# Altium PCB Trigger.PcbDoc
Units mil, origin at the board's own origin, x right, y up, seen from the top; angles counter-clockwise.
Board outline 3937.01 x 3937.01 mil, 2 copper layers (Top Layer, Bottom Layer); 31 components, 13 nets, 69 pads, 40 vias.
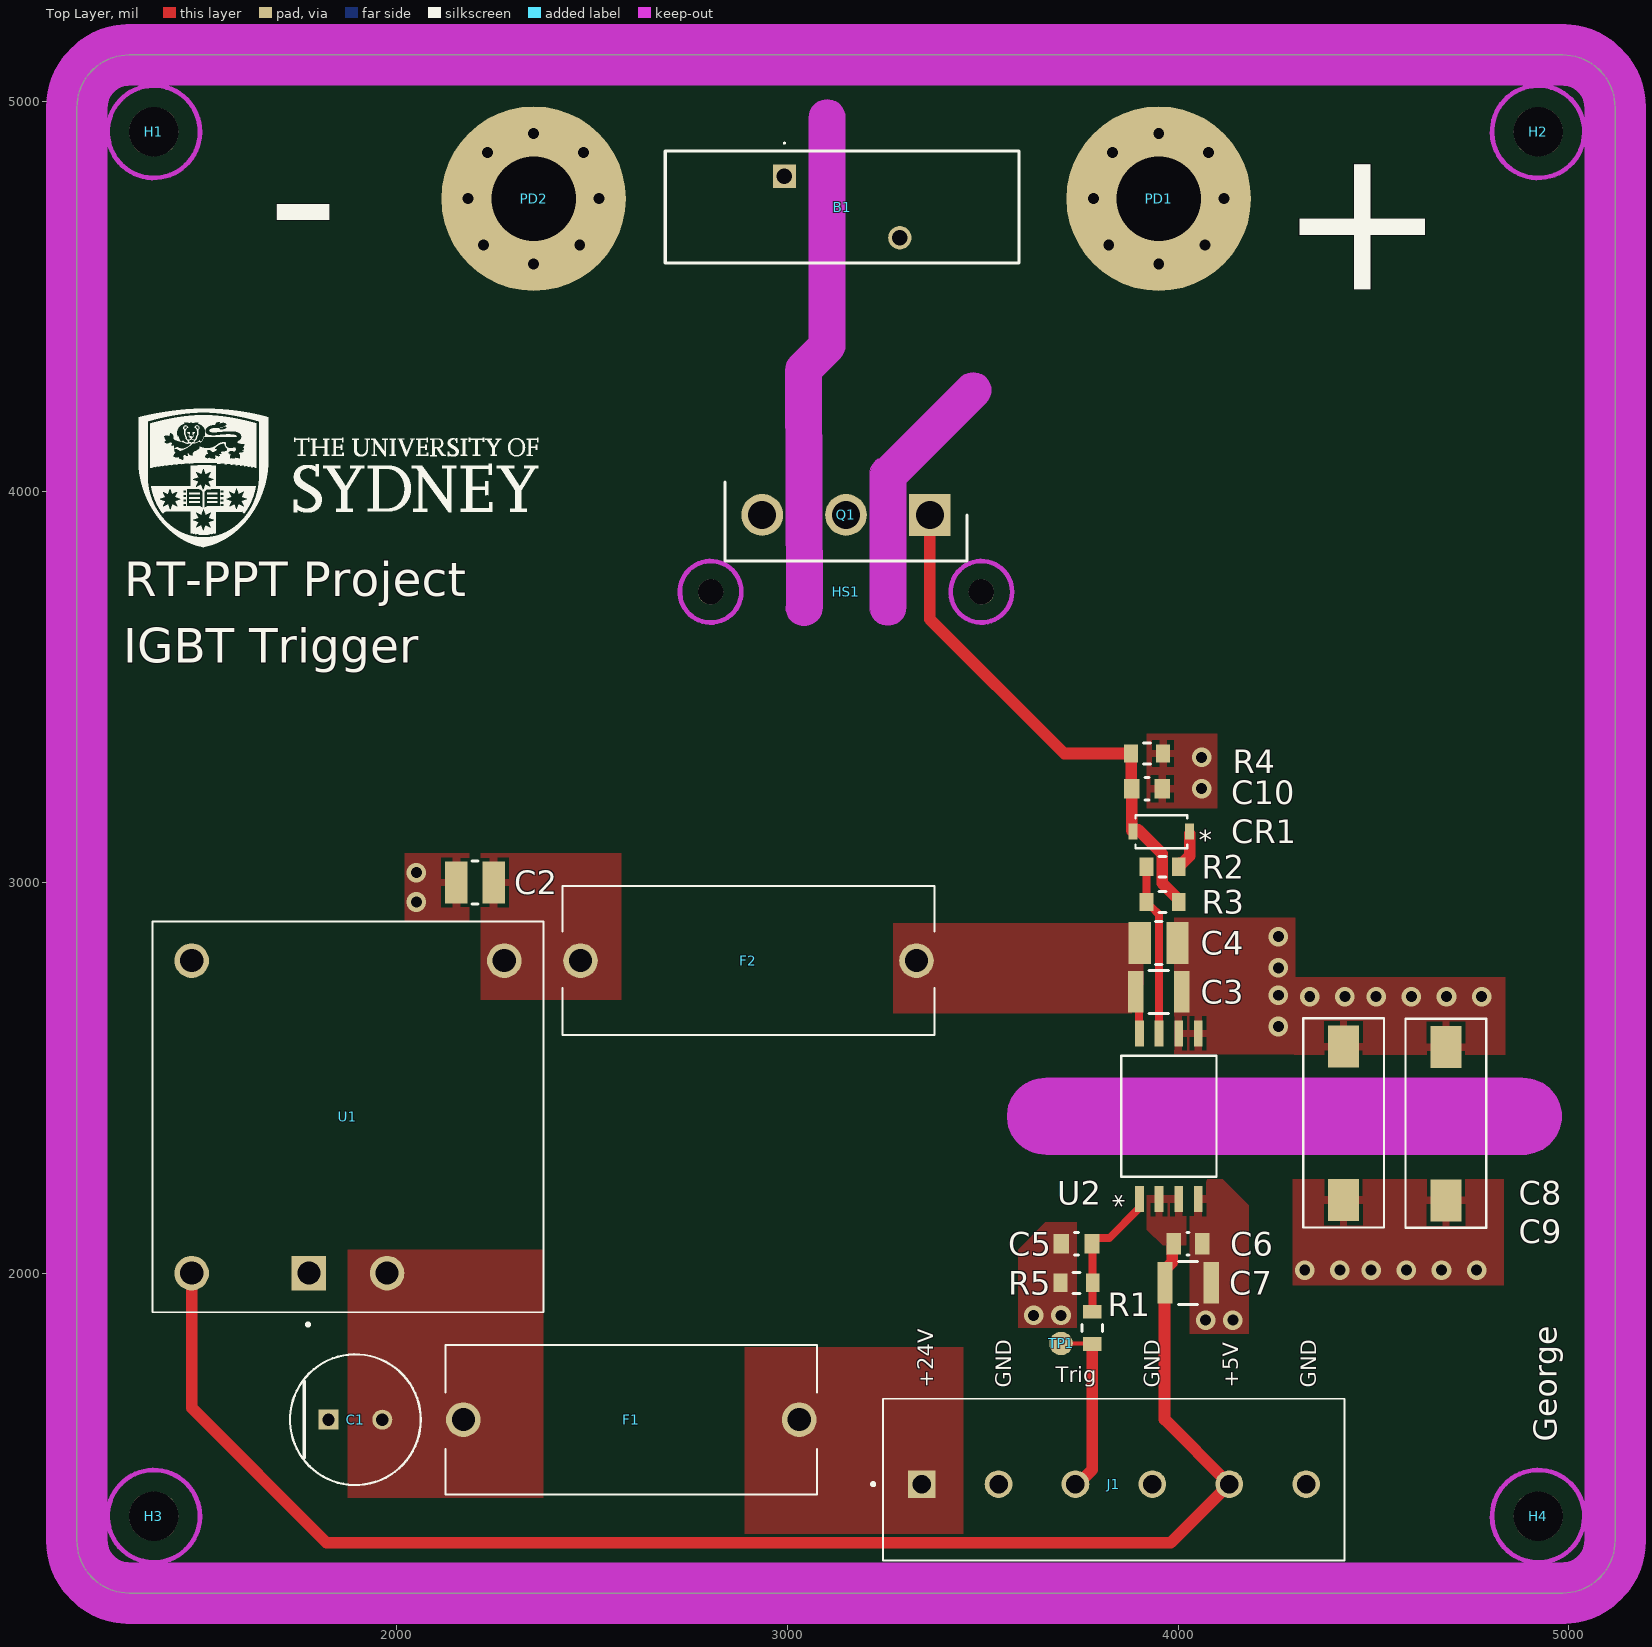
[diagram p0: Top Layer view]
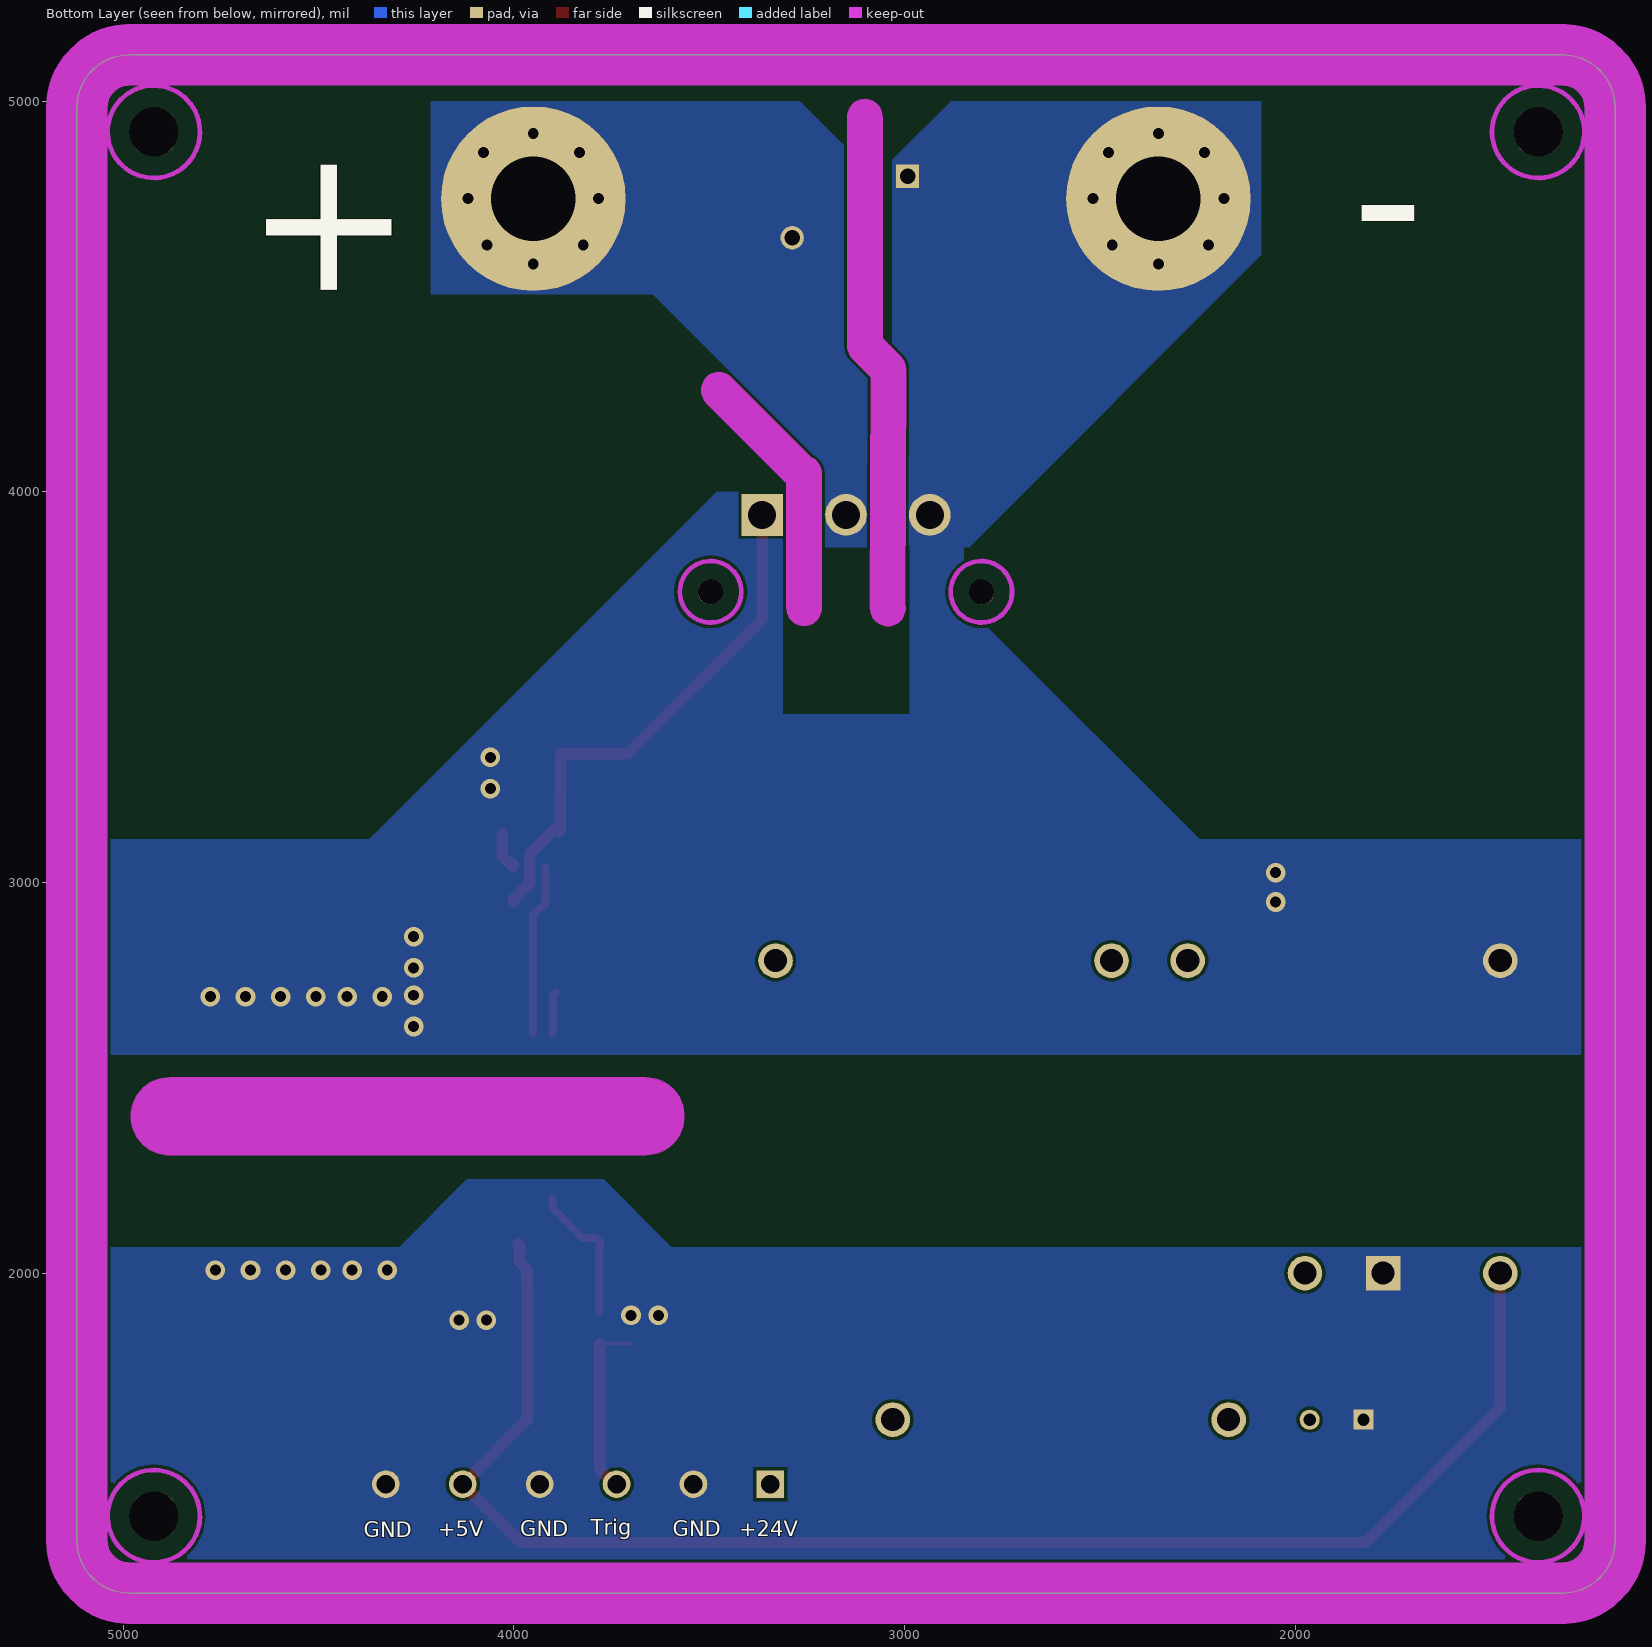
[diagram p1: Bottom Layer view, seen from below]
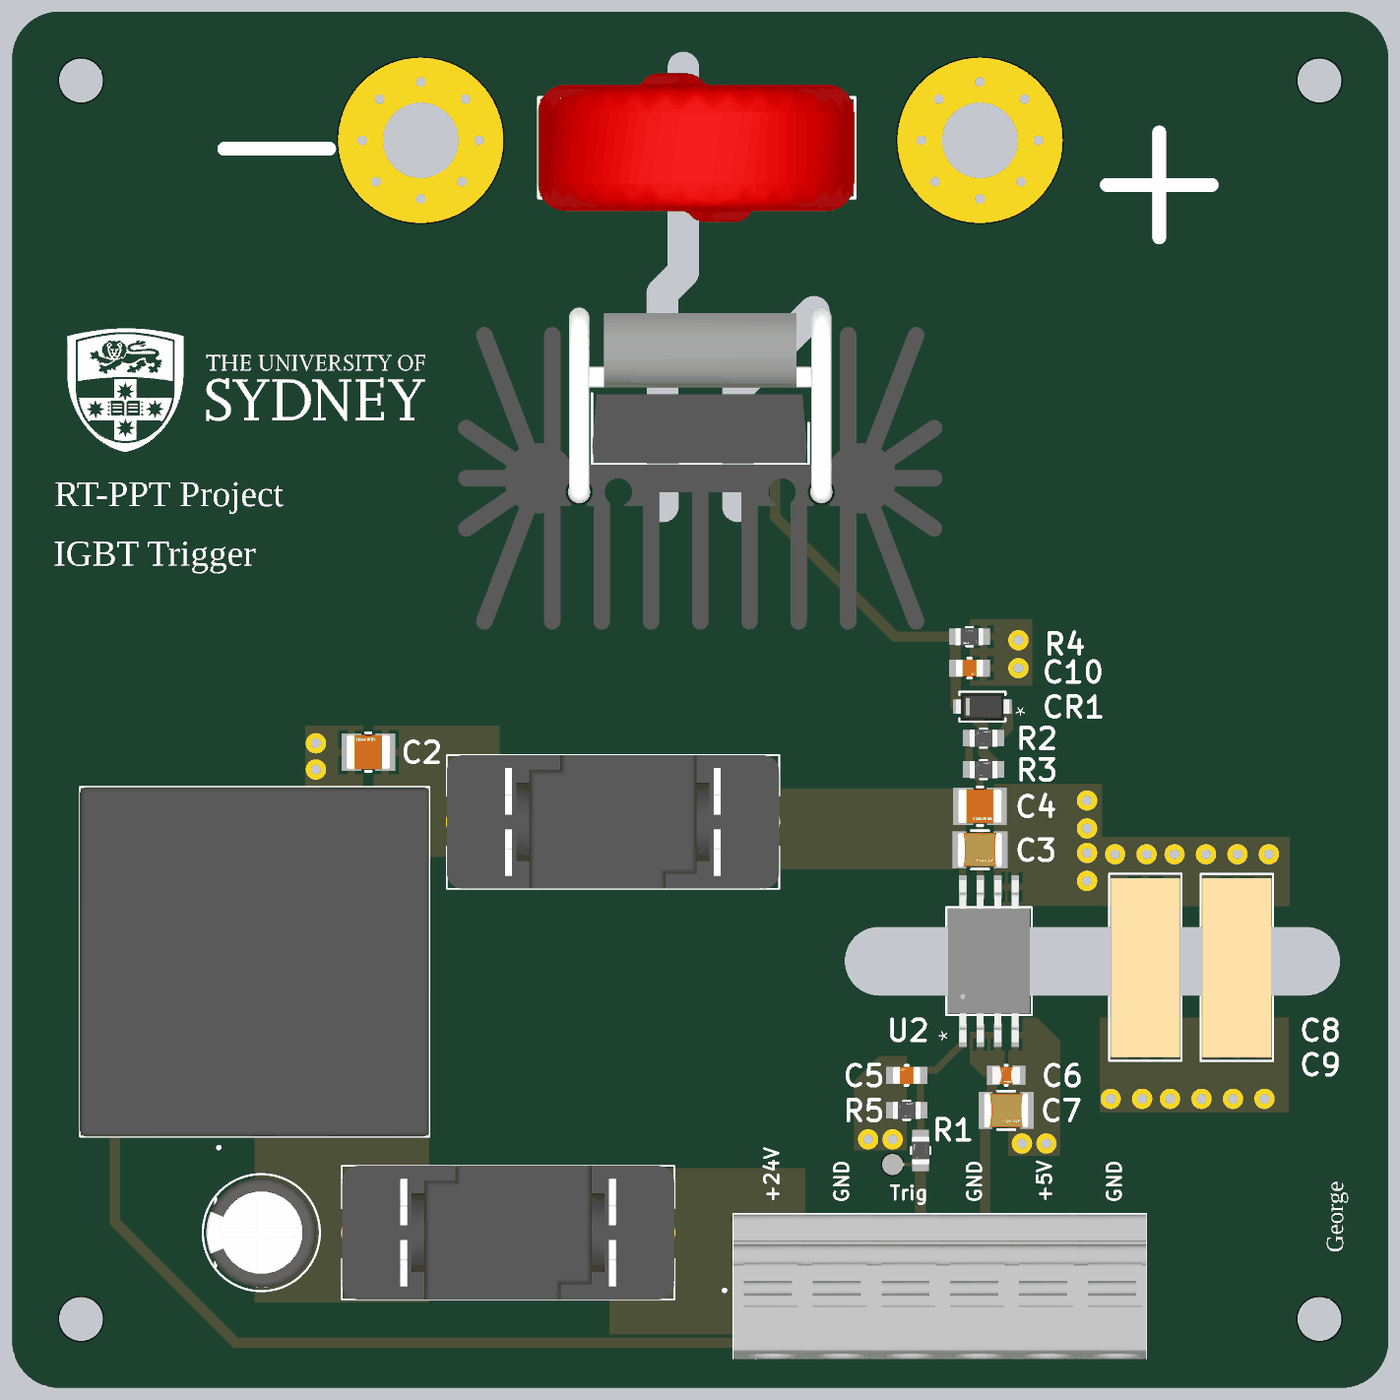
[diagram p2: 3D render of the assembled board from above, using the file's embedded part models]

## Layer stack, top to bottom
Top Solder: solder mask 0.4, Solder Resist, Dk 3.5
Top Layer: signal copper 2.7559
Dielectric 1: dielectric 12.6, FR-4, Dk 4.8
Bottom Layer: signal copper 2.7559
Bottom Solder: solder mask 0.4, Solder Resist, Dk 3.5

## Board outline
1315.52,1181.1 cw(c1315.52,1315.52) 1181.1,1315.52 1181.1,4983.69 cw(c1315.52,4983.69) 1315.52,5118.11 4983.69,5118.11 cw(c4983.69,4983.69) 5118.11,4983.69 5118.11,1315.52 cw(c4983.69,1315.52) 4983.69,1181.1
cut-out: 3661.42,2303.13 cw(c3661.42,2401.57) 3661.42,2500.01 4881.89,2500.01 cw(c4881.89,2401.57) 4980.33,2401.57 cw(c4881.89,2401.57) 4881.89,2303.13
cut-out: 2997.86,3711.26 2995.66,4312.78 cw(c3040.95,4312.95) 3008.92,4344.97 3055.96,4392.01 3055.96,4958.75 cw(c3101.25,4958.75) 3146.54,4958.75 3146.54,4373.25 cw(c3101.25,4373.25) 3133.28,4341.22 3086.31,4294.25 3088.48,3703.36 3088.48,3703.19 cw(c3043.18,3703.19) 3075.29,3671.25 3074.39,3670.34 cw(c3042.25,3702.25)
cut-out: 3211.71,3703 3211.71,4046 cw(c3257,4046) 3238.11,4087.17 3442.97,4292.03 cw(c3475,4260) 3520.29,4260 cw(c3475,4260) 3507.03,4227.97 3302.29,4023.24 3302.29,3703 cw(c3257,3703)

## Design rules (kind name [scope] priority, off if disabled: settings)
Clearance [All] p1: gap=8 ignorepadtopadclearanceinfootprint=FALSE
ComponentClearance [All] p1: gap=8 collisioncheckmode=3 verticalgap=8 showdistances=FALSE
DiffPairsRouting [All] p1: maxlimit=10 minlimit=7.87 mostfreqgap=10 toplayer_minwidth=9.84 toplayer_maxwidth=15 toplayer_prefwidth=11.81 bottomlayer_minwidth=9.84 bottomlayer_maxwidth=15 bottomlayer_prefwidth=11.81 maxuncoupledlength=500
Height [All] p1: minheight=0 maxheight=3937.01 prefheight=500
HoleSize [All] p1: absolutevalues=TRUE maxlimit=236.22 minlimit=11.81 maxpercent=80.000 minpercent=20.000
HoleToHoleClearance [All] p1: gap=8 allowstackedmicrovias=TRUE
MatchedLengths MDI_*_MatchedLengths [InDifferentialPair ('MDI_2') Or InDifferentialPair ('MDI_3') Or InDifferentialPair ('MDI_1') Or InDifferentialPair ('MDI_0')] p1: tolerance=39.37 checknetsindiffpair=FALSE checkdiffpairvsdiffpair=TRUE checkxsignals=TRUE checkothers=TRUE
MatchedLengths TRX0_MatchedLengths [InDifferentialPair ('TRX0')] p2: tolerance=39.37 checknetsindiffpair=FALSE checkdiffpairvsdiffpair=TRUE checkxsignals=TRUE checkothers=TRUE
MatchedLengths SPE_MatchedLengths [InDifferentialPair ('SPE')] p3: tolerance=39.37 checknetsindiffpair=TRUE checkdiffpairvsdiffpair=FALSE checkxsignals=FALSE checkothers=FALSE
MinimumAnnularRing [All] p1: minimumring=5.91
MinimumSolderMaskSliver [All] p1: minsoldermaskwidth=5.91
PolygonConnect [All] p1: thpad.connectstyle=Direct thpad.reliefconductorwidth=10 thpad.reliefentries=4 thpad.polygonreliefangle="90 Angle" thpad.airgapwidth=10 smdpad.connectstyle=Relief smdpad.reliefconductorwidth=20 smdpad.reliefentries=4 smdpad.polygonreliefangle="90 Angle" smdpad.airgapwidth=10 via.connectstyle=Direct via.reliefconductorwidth=10 via.reliefentries=4 via.polygonreliefangle="90 Angle" via.airgapwidth=10
RoutingVias GND/VIN [InNet('GND') Or InNet('VIN')] p1: holewidth=11.81 width=23.62 viastyle="Through Hole" minholewidth=11.81 minwidth=23.62 maxholewidth=11.81 maxwidth=39.37
RoutingVias [All] p2: holewidth=11.81 width=23.62 viastyle="Through Hole" minholewidth=11.81 minwidth=23.62 maxholewidth=11.81 maxwidth=39.37
SilkToSilkClearance [All] p1: silktosilkclearance=8
SilkToSolderMaskClearance Vias [IsVia] p1: minsilkscreentomaskgap=8 clearancetoexposedcopper=TRUE
SilkToSolderMaskClearance Pads [IsPad] p2: minsilkscreentomaskgap=8 clearancetoexposedcopper=TRUE
SolderMaskExpansion [All] p1: expansion=4 istentingtop=FALSE
SupplyNets "Schematic Supply Nets_16" [InNet('PWR_GND')] p1: voltage=0.000
SupplyNets "Schematic Supply Nets_3" [InNet('+24V')] p2: voltage=0.000
SupplyNets "Schematic Supply Nets_1" [InNet('+5V')] p3: voltage=0.000
SupplyNets "Schematic Supply Nets" [InNet('+12V_ISO')] p4: voltage=0.000
SupplyNets "Schematic Supply Nets_2" [InNet('GND')] p5: voltage=0.000
UnRoutedNet [All] p1: checkbadconnections=TRUE
Width [All] p1: maxlimit=50 minlimit=8 preferedwidth=8
21 further rules are at their usual default settings.

## Components (designator, comment, footprint, x,y, rotation, side; value= is the part's Value field where it differs from the comment)
B1 "V420LA40BP" V420LA40BP 2992.13,4807.48 r0 top
C1 "EEUFM1H101" FP-RAD-TH-D_8_0_5-L_11_5-MFG 1893.9,1625 r0 top
C2 "CL32B106KBJNNNE" FP-CL32-IPC_C 2200,3000 r180 top
C3 "CC1210KKX7R9BB105" FP-CC1210-GA-MFG 3950,2720 r0 top value=1uF
C4 "CL32B106KBJNNNE" FP-CL32-IPC_C 3950,2845 r0 top
C5 "08051A100JAT2A" FP-0805-L_2_01_0_2-W_1_25-MFG 3740,2075 r180 top
C6 "CC0805KRX7R9BB104" FP-CC0805-0_85-MFG 4025,2075 r0 top value="100 nF"
C7 "CC1210KKX7R9BB105" FP-CC1210-GA-MFG 4025,1975 r0 top value=1uF
C8 "B32021A3472M189" "CAP_5.0 X 11.0 X 13.0_EPC" 4423.15,2187 r90 top
C9 "B32021A3472M189" "CAP_5.0 X 11.0 X 13.0_EPC" 4685.04,2186.06 r90 top
C10 "08051A100JAT2A" FP-0805-L_2_01_0_2-W_1_25-MFG 3920,3240 r0 top
CR1 "SMF33A-TP" SOD-123FL_MCC 3956.69,3129.92 r180 top
F1 "4527" FUSE_4527 2600,1625 r180 top
F2 "4527" FUSE_4527 2900,2800 r0 top
H1 "M3_Hole" M3_HOLE 1377.95,4921.26 r0 top
H2 "M3_Hole" M3_HOLE 4921.26,4921.26 r0 top
H3 "M3_Hole" M3_HOLE 1377.95,1377.95 r0 top
H4 "M3_Hole" M3_HOLE 4921.26,1377.95 r0 top
HS1 "R2A-CT4-38E" HEAT_SINK 3149.61,3783.27 r180 top
J1 "1792902" PHOENIX_1792902 3244.72,1265.12 r0 top
PD1 "M5_Pad" M5_Pad 3950,4750 r0 top
PD2 "M5_Pad" M5_Pad 2350,4750 r0 top
Q1 "STGW40N120KD" TO545P515X1560X2445-3P 3364.17,3940.75 r180 top
R1 "RT0805FRE0710RL" FP-RT0805-MFG 3780,1860 r90 top value=10Ω
R2 "RT0805FRE0710RL" FP-RT0805-MFG 3960,3040 r0 top value=10Ω
R3 "RT0805FRE0710RL" FP-RT0805-MFG 3960,2950 r0 top value=10Ω
R4 "RT0805FRE0710KL" FP-RT0805-MFG 3920,3330 r180 top value=10KΩ
R5 "RT0805FRE0710KL" FP-RT0805-MFG 3740,1975 r0 top value=10KΩ
TP1 "Test Point" TEST_PAD 3700,1820 r0 top
U1 "PDQE10-Q48-S12-D" CONV_PDQE10-Q48-S12-D 1875,2400 r180 top
U2 "UCC5304DWVR" SOIC8_DWV_TEX 3975.79,2401.57 r90 top

## Footprints (in the part's own frame and the unit in brackets; to place one, negate y for a bottom-side part, rotate by r counter-clockwise, add the part's x,y. Pads: shape width x height; smd on the part's side, far side on the other; paste and mask are expansions set on the pad)
"CAP_5.0 X 11.0 X 13.0_EPC" [mm]
  rect 2.75x2 smd: 1(0,0) 2(9.982,0)
  silkscreen extent -1.78,-2.63 11.81,2.63, body extent -1.51,-2.5 11.49,2.5, height 15.5
CONV_PDQE10-Q48-S12-D [mm]
  rect 2.25x2.25 hole 1.5: 1(2.54,10.16)
  round 2.25 hole 1.5: 2(-2.54,10.16) 3(-10.16,-10.16) 5(10.16,-10.16) 6(10.16,10.16)
  silkscreen extent -12.7,-12.7 12.7,13.6, body extent -12.7,-12.7 12.7,12.7, height 11.7
FP-0805-L_2_01_0_2-W_1_25-MFG [mm]
  rect 1x1.25 smd paste+0 mask+0: 1(-1,0) 2(1,0)
  silkscreen extent -0.13,-0.72 0.13,0.72, body extent -1.6,-0.82 1.6,0.82, height 0.25
FP-CC0805-0_85-MFG [mm]
  rect 0.95x1.4 smd paste+0 mask+0: 1(-0.925,0) 2(0.925,0)
  silkscreen extent -0.08,-0.72 0.08,0.72, body extent -1.6,-1.05 1.6,1.05, height 0.25
FP-CC1210-GA-MFG [mm]
  rect 1x2.7 smd paste+0 mask+0: 1(-1.5,0) 2(1.5,0)
  silkscreen extent -0.63,-1.4 0.63,1.4, body extent -2.2,-1.7 2.2,1.7, height 0.25
FP-CL32-IPC_C [mil]
  rect 57.19x106.46 smd paste+0 mask+0: 1(-48.24,0) 2(48.24,0)
  silkscreen extent -8,-55 8,55, body extent -81,-59 81,59, height 10
FP-RAD-TH-D_8_0_5-L_11_5-MFG [mm]
  rect 1.3x1.3 hole 0.8 paste-2539.97 mask+0: 1(-1.75,0)
  round 1.3 hole 0.8 paste-2539.97 mask+0: 2(1.75,0)
  silkscreen extent -4.25,-4.25 4.25,4.25, body extent -4.35,-4.35 4.35,4.35, height 0.25
FP-RT0805-MFG [mm]
  rect 0.9x1.2 smd paste+0 mask+0: 1(-1.05,0) 2(1.05,0)
  silkscreen extent -0.23,-0.67 0.23,0.67, body extent -1.6,-0.77 1.6,0.77, height 0.25
FUSE_4527 [mm]
  round 2.25 hole 1.5: 1(-10.92,0) 2(10.92,0)
  silkscreen extent -12.08,-4.85 12.08,4.85, body extent -12.08,-4.85 12.08,4.85, height 10.79
HEAT_SINK [mil]
  round 65 / inner round 90 / far side round 65 hole 65 unplated: 1(-346.46,39.37) 2(346.46,39.37)
  body extent -693,-488 693,433, height 1496
M3_HOLE [mm]
  round 3.2 hole 3.2 unplated: ""(0,0)
  Keep-Out Layer lines w0.305: 2.999,-0.057 cw(c0,0) 3,0
M5_Pad [mm]
  round 12 hole 5.5: 1(0,0)
PHOENIX_1792902 [mm]
  rect 1.8x1.8 / inner round 1.8 / far side rect 1.8x1.8 hole 1.2: 01(2.5,4.95)
  round 1.8 hole 1.2: 02(7.5,4.95) 03(12.5,4.95) 04(17.5,4.95) 05(22.5,4.95) 06(27.5,4.95)
  silkscreen extent -0.75,0 30,10.5, body extent 0,-0.05 30,10.45, height 13.6
SOD-123FL_MCC [mil]
  rect 23x41 smd paste+0 mask+0: 1(-72.5,0) 2(72.5,0)
  silkscreen extent -66,-43 66,43, body extent -76,-37 76,37, height 53
SOIC8_DWV_TEX [mil]
  rect 67x22 smd paste+0 mask+0: 1(-212,75) 2(-212,25) 3(-212,-25) 4(-212,-75) 5(212,-75) 6(212,-25) 7(212,25) 8(212,75)
  silkscreen extent -154,-122 154,122, body extent -231,-117 231,117, height 110
TEST_PAD [mil]
  round 60 smd: 1(0,0)
TO545P515X1560X2445-3P [mm]
  rect 2.715x2.715 / inner round 2.715 / far side rect 2.715x2.715 hole 1.81: 1(0,0)
  round 2.715 hole 1.81: 2(5.45,0) 3(10.9,0)
  silkscreen extent -2.42,-2.15 13.33,3, body extent -2.3,-2.1 13.3,2.9, height 25.1
V420LA40BP [mm]
  rect 1.515x1.515 hole 1.01: 1(0,0)
  round 1.515 hole 1.01: 2(7.5,-4)
  silkscreen extent -7.75,-5.65 15.25,2.2, body extent -7.8,-7.4 15.2,3.4, height 27.97

## Part data
B1: "Littelfuse LA Series Variable Resistor 600pF 100A, Clamping 1060V, Varistor 610  720V", Manufacturer_Name=LITTELFUSE, Mouser Part Number=576-V420LA40BP, Datasheet Link=https://www.littelfuse.com/~/media/electronics/datasheets/varistors/littelfuse_varistor_la_datasheet.pdf.pdf, Geometry.Height=28mm, Manufacturer_Part_Number=V420LA40BP, Mouser Price/Stock=https://www.mouser.co.uk/ProductDetail/Littelfuse/V420LA40BP?qs=%252BvNVc1OwqXLcs1GzcX8aHQ%3D%3D
C1: library part CMP-05427-001978-1, "Aluminum Electrolytic Capacitors (Radial Lead Type) 100uF ±20% 50V", Capacitance=100uF
C2 C4: library part CMP-2000-06110-2, "Cap Ceramic 10uF 50V X7R ±10% SMD 1210 +125°C Embossed T/R", Capacitance=10uF, Case Code (Imperial)=1210, Case Code (Metric)=3225, Dielectric=X7R, Max Operating Temperature=125°C, Min Operating Temperature=-55°C, Package Quantity=1, Tolerance=10%, Voltage=50V, Case/Package=1210, Depth=2.5mm, Height=2.5mm, Lead Free="Lead Free", Length=3.2mm, Material=Ceramic, Mount="Surface Mount", Packaging="Tape and Reel", Radiation Hardening=No, Thickness=0.106inch, Voltage Rating=50V, Voltage Rating (DC)=50V, Width=0.098inch
C3 C7: library part CMP-03422-000918-1, "CAP CER 1UF 50V X7R 1210", Capacitance=1uF, Manufacturer=Yageo, Package=CC1210-GA, Temperature="-55°C to +125°C", Temperature Characteristic=X7R, Temperature Coefficient=15%, Temperature Range High=+125°C, Temperature Range Low=-55°C, Tolerance=10%, Voltage Rating=50V, Automotive=No, Category=Cap, ComponentLink2Description=Datasheet, ComponentLink2URL=http://www.yageo.com/documents/recent/UPY-GPHC_X7R_6.3V-to-50V_18.pdf, Device Class L1="Passive Components", Device Class L2=Capacitors, Device Class L3="Ceramic Capacitors", Digikey Description="CAP CER 1UF 50V X7R 1210", Footprint Url=http://www.yageo.com/exep/pages/download/literatures/UPY-C_GEN_24.pdf, Height=1.45mm, Ipc Land Pattern Name=CAPC320250X125, Lead Free=Yes, Manufacturer Part Number=CC1210KKX7R9BB105, Material=Ceramic, Mouser Description="1210 1 uF 50 V ±10 % Tolerance X7R SMT Multilayer Ceramic Capacitor", Octopart=https://octopart.com/cc1210kkx7r9bb105-yageo-22054290, RoHS=TRUE
C5 C10: library part CMP-2007-04116-2, "General Purpose Ceramic Capacitor, 0805, 10pF, 5%, C0G, 30ppm/°C, 100V", Capacitance=10pF, Case Code (Imperial)=0805, Case Code (Metric)=2012, Dielectric=C0G, Insulation Resistance=100GR, Max Operating Temperature=125°C, Min Operating Temperature=-55°C, Package Quantity=1, Temperature Coefficient=30ppm/°C, Tolerance=5%, Voltage=100V, Case/Package=0805, Depth=1.25mm, Dissipation Factor=1.9%, Height=0.94mm, Lead Free="Lead Free", Length=2.01mm, Mount="Surface Mount", Number of Pins=2, Packaging="Tape and Reel", Radiation Hardening=No, REACH SVHC="No SVHC", RoHS Compliant=Yes, Series=-, Termination=SMD/SMT, Thickness=0.037inch, Voltage Rating=100V, Voltage Rating (DC)=100V, Weight=0.000194oz, Width=1.25mm
C6: library part CMP-2100-03606-3, "CAP CER 0.1UF 50V X7R 0805", Capacitance="100 nF", Manufacturer=Yageo, Package=CC0805-0.85, Temperature="-30°C to +85°C", Temperature Characteristic=X7R, Temperature Range High=+85°C, Temperature Range Low=-30°C, Tolerance=0.1, Voltage Rating="50 V", Automotive=No, Category=Cap, ComponentLink2Description=Datasheet, ComponentLink2URL=http://www.yageo.com/documents/recent/UPY-GPHC_Y5V_6.3V-to-50V_8.pdf, Device Class L1="Passive Components", Device Class L2=Capacitors, Device Class L3="Ceramic Capacitors", Digikey Description="CAP CER 0.1UF 50V X7R 0805", Footprint Url=http://www.yageo.com/exep/pages/download/literatures/UPY-C_GEN_24.pdf, Height=0.95mm, Ipc Land Pattern Name=CAPC200125X85, Lead Free=Yes, Manufacturer Part Number=CC0805KRX7R9BB104, Material=Ceramic, Mouser Description="Multilayer Ceramic Capacitors MLCC - SMD/SMT 100nF 50V X7R 10%", Octopart=https://octopart.com/cc0805krx7r9bb104-yageo-192993, RoHS=TRUE
C8 C9: "No Description Available", Capacitance=4.7nF, Manufacturer_Name="TDK Epcos", rating=Y-Rated, Copyright="Copyright (C) 2025 Ultra Librarian. All rights reserved.", Manufacturer_Part_Number=B32021A3472M189
CR1: "No Description Available", Manufacturer_Name=MCC, Copyright="Copyright (C) 2025 Ultra Librarian. All rights reserved.", Manufacturer_Part_Number=SMF33A-TP
F1 F2: "5mm Low Profile Holder", Package=None, Availability="In Stock", Check_prices=https://www.snapeda.com/parts/4527/Keystone+Electronics/view-part/?ref=eda, MF=Keystone, MP=4527, Price=None, Purchase-URL=https://pricing.snapeda.com/search/part/4527/?ref=eda, SnapEDA_Link=https://www.snapeda.com/parts/4527/Keystone+Electronics/view-part/?ref=snap
HS1: "Heatsink, TO-247, 8.6degC/W, 35.2 x 22 x 38mm, Spring Clip Mount", Case/Package=TO-247, Color=Black, Manufacturer=Ohmite, Natural Thermal Resistance=8.6°C/W, Package Quantity=5, Supplier Part Number=R2A-CT4-38E-ND, Thermal Resistance @ Forced Air Flow (100 LFM)=1°C/W, Category="Heat Sinks", ComponentLink1Description=https://datasheet.ciiva.com/1004/r2-series-1004312.pdf?src-supplier=Digikey, ComponentLink1URL=https://datasheet.ciiva.com/1004/r2-series-1004312.pdf?src-supplier=Digikey, ComponentLink2Description=https://datasheet.ciiva.com/39123/52r2-sink-39123818.pdf?src-supplier=Onlinecomponents.com, ComponentLink2URL=https://datasheet.ciiva.com/39123/52r2-sink-39123818.pdf?src-supplier=Onlinecomponents.com, ComponentLink3Description=https://datasheet.ciiva.com/14543/70231642-14543768.pdf?src-supplier=Allied+Electronics, ComponentLink3URL=https://datasheet.ciiva.com/14543/70231642-14543768.pdf?src-supplier=Allied+Electronics, Finish=Anodized, Height=22mm, Lead Free="Lead Free", Length=38mm, Manufacturer Part Number=R2A-CT4-38E, Material=Aluminium, Mounting Technology="Clip,PC Pin,Screw", Package Cooled=TO-247, Pricing="1=4.51, 10=3.996, 25=3.8064, 50=3.669, 100=3.5363, 480=3.25325, 960=3.13527, 1440=3.06819 (USD)", Reach SVHC Compliant=Unknown, RoHS=Yes, RoHS Compliant=Yes, Series=R2, Shape=Fins,Rectangular, Stock=8364, Supplier=Digikey, Type=Passive, Weight=6.4oz, Width=35.2mm
J1: Package=None, Availability=Unavailable, MP=1792902, Price=None
Q1: "STMicroelectronics STGW40N120KD IGBT, 80 A 1200 V, 3-Pin TO-247", Manufacturer_Name=STMicroelectronics, Datasheet Link=http://www.st.com/web/en/resource/technical/document/datasheet/CD00224575.pdf, Geometry.Height=5.15mm, Manufacturer_Part_Number=STGW40N120KD
R1 R2 R3: library part CMP-03412-028725-1, "RES SMD 10 OHM 1% 1/8W 0805", Manufacturer=Yageo, Package=RT0805, Power Rating=0.125W, Resistance=10Ω, Temperature="-55°C to +155°C", Temperature Coefficient="50 ppm/°C", Temperature Range High=+155°C, Temperature Range Low=-55°C, Tolerance=0.0001, Voltage Rating=150V, Automotive=No, Category=Res, ComponentLink2Description=Datasheet, ComponentLink2URL=http://www.yageo.com/documents/recent/PYu-RT_1-to-0.01_RoHS_L_9.pdf, Composition="Thin Film", Device Class L1="Passive Components", Device Class L2=Resistors, Device Class L3="Chip SMD Resistors", Digikey Description="RES SMD 10 OHM 1% 1/8W 0805", Footprint Url=http://www.yageo.com/exep/pages/download/literatures/PYu-R_Mount_10.pdf, Height=0.6mm, Ipc Land Pattern Name=RESC200125X50, Lead Free=Yes, Manufacturer Part Number=RT0805FRE0710RL, Mouser Description="High Precision-High Stability Chip Resistor Thin Film 0805 10Ohm 1% Paper T/R", Octopart=https://octopart.com/rt0805fre0710rl-yageo-39855890, RoHS=TRUE, Series=RT
R4 R5: library part CMP-03412-023097-1, "RES 10.0K OHM 1/8W 1% SMD 0805", Manufacturer=Yageo, Package=RT0805, Power Rating=0.125W, Resistance=10KΩ, Temperature="-55°C to +155°C", Temperature Coefficient="50 ppm/°C", Temperature Range High=+155°C, Temperature Range Low=-55°C, Tolerance=0.0001, Voltage Rating=150V, Automotive=No, Category=Res, ComponentLink2Description=Datasheet, ComponentLink2URL=http://www.yageo.com/documents/recent/PYu-RT_1-to-0.01_RoHS_L_9.pdf, Composition="Thin Film", Device Class L1="Passive Components", Device Class L2=Resistors, Device Class L3="Chip SMD Resistors", Digikey Description="RES 10.0K OHM 1/8W 1% SMD 0805", Footprint Url=http://www.yageo.com/exep/pages/download/literatures/PYu-R_Mount_10.pdf, Height=0.6mm, Ipc Land Pattern Name=RESC200125X50, Lead Free=Yes, Manufacturer Part Number=RT0805FRE0710KL, Mouser Description="Thin Film Resistors 1/8W 10K ohm 1% 50ppm", Octopart=https://octopart.com/rt0805fre0710kl-yageo-40301150, RoHS=TRUE, Series=RT
TP1: "Just a Pad", Color=Orange,White, Flammability Rating="UL94 V-0", Forward Current=3A, Forward Voltage=1.08V, Manufacturer="Keystone Electronics", Manufacturer Part Number=5003, Package Quantity=10, Supplier Part Number=36-5003-ND, Body Material=PBT, Category=Connectors, ComponentLink1Description=https://datasheet.ciiva.com/4598/5000-5004-4598618.pdf?src-supplier=Mouser, ComponentLink1URL=https://datasheet.ciiva.com/4598/5000-5004-4598618.pdf?src-supplier=Mouser, ComponentLink2Description=https://datasheet.ciiva.com/16885/70182825-16885788.pdf?src-supplier=Allied+Electronics, ComponentLink2URL=https://datasheet.ciiva.com/16885/70182825-16885788.pdf?src-supplier=Allied+Electronics, ComponentLink3Description=https://datasheet.ciiva.com/1454/1703983-1454826.pdf?src-supplier=Element14, ComponentLink3URL=https://datasheet.ciiva.com/1454/1703983-1454826.pdf?src-supplier=Element14, ComponentLink4Description=https://datasheet.ciiva.com/22631/1703983-22631103.pdf?src-supplier=Element14, ComponentLink4URL=https://datasheet.ciiva.com/22631/1703983-22631103.pdf?src-supplier=Element14, Contact Material=Bronze, Contact Plating=Silver,Tin, Height=0.3inch, Inside Diameter=1.27mm, Lead Free="Lead Free", Length=7.62mm, Material=Nylon,Bronze,Silver, Mounting Technology="PCB,Through Hole", Outside Diameter=2.54mm, Packaging=Bulk, Pins=1, Plating=Silver, Pricing="1=0.39, 10=0.293, 25=0.2624, 100=0.2223, 500=0.18446, 1000=0.1739, 2500=0.1542, 5000=0.14312 (USD)", Radiation Hardening=No, Reach SVHC Compliant=No, RoHS=Yes, RoHS Compliant=Yes, Series=THM, Stock=130387, Supplier=Digikey, Termination="Through Hole", Weight=4.535924g, Width=6.35mm
U1: "10 W, 4:1 Input Range, Single/Dual Regulated Output, 1500 Vdc Isolation, Dc-Dc Converter", Package="DIP-6 CUI", Availability="In Stock", Check_prices=https://www.snapeda.com/parts/PDQE10-Q48-S12-D/CUI/view-part/?ref=eda, CUI_purchase_URL=https://www.cui.com/product/dc-dc-converters/isolated/pdqe10-d-series?utm_source=snapeda.com&utm_medium=referral&utm_campaign=snapedaBOM, MF="CUI Inc.", MP=PDQE10-Q48-S12-D, Price=None, Purchase-URL=https://pricing.snapeda.com/search/part/PDQE10-Q48-S12-D/?ref=eda, SnapEDA_Link=https://www.snapeda.com/parts/PDQE10-Q48-S12-D/CUI/view-part/?ref=snap
U2: "5kVrms, 4A/6A single-channel isolated gate driver with 5V UVLO for GaNFETs & MOSFETs 8-SOIC -40 to 125", Manufacturer_Name="Texas Instruments", Copyright="Copyright (C) 2025 Ultra Librarian. All rights reserved.", Datasheet=https://www.ti.com/lit/gpn/ucc5304, Manufacturer_Part_Number=UCC5304DWVR, RefDes=RefDes, Type=Type

## Via types
v1: diameter 50, hole 28, Top Layer to Bottom Layer, 40 vias

## Nets (pads, with @x,y where several pads share a name; then routed paths per layer and width w, separated by ;. In a path a pad name is that pad's centre, name@x,y a point inside that pad or via, vN(x,y) a via of type N, cw(c..) or ccw(c..) an arc to the next point about the centre after c; other vN are vias at no path point)
+5V: C6.1 C7.1 J1.05 U1.6 U2.2 U2.3 | length 3898.5
  Top Layer w30: U1.6 1475,1655 1820,1310 3980.55,1310 J1.05 3965,1625.55 C7.1@3965,1975 ; C7.1 3965.94,2008.46 3984.88,2027.4 3984.88,2071.3 C6.1
+12V_ISO: C3.1 C4.1 F2.2 U2.8 | length 110.5
  Top Layer w20: C3.1 3899.79,2711.16 3899.79,2614.57 U2.8
+24V: F1.1 J1.01
GND: C1.1 C5.2 C6.2 C7.2 C8.1 C9.1 J1.02 J1.04 J1.06 R5.1 U1.1 U2.4
  other v1: 4070,1880 4140,1880 3629.91,1891.89 3699.91,1891.89 4323.78,2007.87 4413.78,2007.87 4493.78,2007.87 4583.78,2007.87 4673.78,2007.87 4763.78,2007.87
NetB1_2: B1.2 PD1.1 Q1.2
  other v1: 3950,4582.68 3822.05,4631.89 4068.11,4631.89 3782.68,4750 4117.32,4750 3831.89,4868.11 4077.95,4868.11 3950,4917.32
NetC1_2: C1.2 F1.2 U1.2
NetC2_1: C2.1 F2.1 U1.3
NetC5_1: C5.1 R1.2 R5.2 U2.1 | length 355
  Top Layer w20: C5.1 3780.35,2074.02 3780.35,1975.98 R5.2 3780.67,1974.33 3780.67,1902.01 R1.2 ; C5.1@3779.37,2079.92 3789.06,2089.61 3823.32,2089.61 3900.79,2167.07 U2.1
NetC10_1: C10.1 CR1.2 Q1.1 R3.2 R4.2 | length 1367.6
  Top Layer w30: Q1.1 3364.17,3673.83 3708,3330 R4.2 3879.65,3329.02 3879.65,3240.98 C10.1 3880.63,3132.75 CR1.2@3883.83,3129.55 ; CR1.2@3884.19,3134.73 3897.79,3134.73 3959.38,3073.15 3959.38,2997.87 4001.34,2955.91 R3.2
NetCR1_1: CR1.1 R2.2 | length 99.4
  Top Layer w30: R2.2 4001.34,3045.91 4004.06,3048.62 4009.96,3048.62 4029.19,3067.85 CR1.1@4029.19,3124.42
NetR2_1: R2.1 R3.1 U2.7 | length 443.2
  Top Layer w20: R2.1 3918.66,2944.09 3926.38,2936.38 3932.28,2936.38 3950.79,2917.87 U2.7
PWR_GND: B1.1 C2.2 C3.2 C4.2 C8.2 C9.2 C10.2 PD2.1 Q1.3 R4.1 U1.5 U2.5 U2.6
  other v1: 4256.23,2631.35 4336.58,2707.56 4426.58,2707.56 4506.58,2707.56 4596.58,2707.56 4686.58,2707.56 4776.58,2707.56 4256.23,2711.35 4256.23,2781.35 4256.23,2861.35 2050,2950 2050,3025 4060,3240 4060,3320 2350,4582.68 2222.05,4631.89 2468.11,4631.89 2182.68,4750 2517.32,4750 2231.89,4868.11 2477.95,4868.11 2350,4917.32
Trigger_Signal: J1.03 R1.1 TP1.1 | length 459
  Top Layer w10: TP1.1 3778.66,1820 R1.1
  Top Layer w30: J1.03@3740.16,1456.69 3780,1496.54 R1.1
pads on no net: H1. H2. H3. H4. HS1.1 HS1.2

## Polygon pours and split planes (outlines as drawn)
PWR_GND on Bottom Layer "NONET_L-01_P-001" (solid, remove dead copper, pour order 6): 5039.37,2559.06 1259.84,2559.06 1259.84,3110.24 2244.09,3110.24 2848,3714.14 2848,4000 2987,4000 2987,3430 3311,3430 3311,4000 3480.31,4000 4370.08,3110.24 5039.37,3110.24
GND on Bottom Layer "Bottom Layer-GND" (solid, remove dead copper, pour order 21): 1220.47,1220.47 5118.11,1220.47 5118.11,2066.93 4293.07,2066.93 4120,2240 3770,2240 3596.93,2066.93 1220.47,2066.93
NetB1_2 on Bottom Layer "NONET_L-01_P-001" (solid, remove dead copper, pour order 4): 3090,4822.28 3267.72,5000 4212.6,5000 4212.6,4505 3644,4505 3240,4101 3240,3858.27 3090,3858.27
PWR_GND on Bottom Layer "NONET_L-01_P-001" (solid, remove dead copper, pour order 5): 2880,5000 3031.5,4850 3031.5,3858.27 2834.65,3858.27 2086.61,4606.3 2086.61,5000
PWR_GND on Top Layer "NONET_L-01_P-001" (solid, remove dead copper, pour order 12): 2185,3075 2185,2900 2020,2900 2020,3075
NetC2_1 on Top Layer "NONET_L-01_P-001" (solid, remove dead copper, pour order 2): 2215,3075 2215,2700 2575,2700 2575,3075
+5V on Top Layer "NONET_L-01_P-001" (solid, remove dead copper, pour order 7): 3920,2200 4020,2200 4020,2071.3 3960,2071.3 3920,2111.3
GND on Top Layer "NONET_L-01_P-001" (solid, remove dead copper, pour order 8): 4114.17,2240 4180,2174.17 4180,2120 4180,1845 4030,1845 4030,2240
GND on Top Layer "NONET_L-01_P-001" (solid, remove dead copper, pour order 9): 4293.15,2240 4293.15,1968.5 4833.15,1968.5 4833.15,2240
PWR_GND on Top Layer "Top Layer-PWR_GND" (solid, remove dead copper, pour order 23): 4296.58,2559.06 4836.58,2559.06 4836.58,2757.56 4300,2757.56 4300,2910 3990,2910 3990,2560 4296.58,2560
PWR_GND on Top Layer "NONET_L-01_P-001" (solid, remove dead copper, pour order 25): 3920,3380 3920,3190 4100,3190 4100,3380
+12V_ISO on Top Layer "NONET_L-01_P-001" (solid, remove dead copper, pour order 24): 3910,2895 3270,2895 3270,2665 3910,2665
+24V on Top Layer "NONET_L-01_P-001" (solid, remove dead copper, pour order 11): 2890,1810 2890,1270 3450,1270 3450,1810
GND on Top Layer "NONET_L-01_P-001" (solid, remove dead copper, pour order 10): 3660,2130 3590,2060 3590,2045 3590,1860 3740,1860 3740,2130
NetC1_2 on Top Layer "NONET_L-01_P-001" (solid, remove dead copper, pour order 1): 1875,2060 1875,1425 2375,1425 2375,1450 2375,2060

## Keep-outs
Keep-Out Layer:
  lines w12: 2881.89,3743.9 cw(c2803.15,3743.9) 2881.89,3744.72 ; 3574.8,3742.89 cw(c3496.06,3743.9) 3574.8,3743.9
  lines w90.55: 3042.25,3702.25 3043.18,3703.19 3040.95,4312.95 3101.25,4373.25 3101.25,4958.75 ; 3257,3703 3257,4046 3261,4046 3475,4260
  lines w157.48: 1181.1,1315.52 ccw(c1315.52,1315.52) 1315.52,1181.1 4983.69,1181.1 ccw(c4983.69,1315.52) 5118.11,1315.52 5118.11,4983.69 ccw(c4983.69,4983.69) 4983.69,5118.11 1315.52,5118.11 ccw(c1315.52,4983.69) 1181.1,4983.69 1181.1,1315.52
  lines w196.85: 3661.42,2401.57 4173.23,2401.57 4881.89,2401.57

## Silkscreen, mask and mechanical layers (free items; w line width, h text height)
Top Overlay:
  drawing of 30 lines, arcs and shapes, not listed
  text "+" at 4310.78,4892.12 h393.7 r270
  text "-" at 1668.23,4574.07 h393.7
  text "RT-PPT Project" at 1301.86,3703.34 h150
  text "IGBT Trigger" at 1299.21,3533.22 h150
  text "Trig" at 3687.09,1720.21 h39.37
  text "+24V" at 3372.91,1707.09 h39.37 r90
  text "GND" at 3572.91,1707.09 h39.37 r90
  text "GND" at 3952.91,1707.09 h39.37 r90
  text "+5V" at 4152.91,1707.09 h39.37 r90
  text "GND" at 4352.91,1707.09 h39.37 r90
  text "George" at 4988.53,1568.1 h100 r90
Bottom Overlay:
  text "+" at 4312.59,4890.04 h393.7 r270
  text "-" at 1670.04,4571.99 h393.7
  text "Trig" at 3802.91,1330.21 h39.37
  text "+24V" at 3422.91,1327.09 h39.37
  text "GND" at 3592.91,1327.09 h39.37
  text "GND" at 3982.91,1327.09 h39.37
  text "+5V" at 4192.91,1327.09 h39.37
  text "GND" at 4383.31,1324.72 h39.37
Bottom Solder:
  region: 2990,4340 3030,4380 3030,4850 2990,4890
  region: 3150,3860 3090,3860 3090,4300 3150,4360 3150,4382.5
  region: 3150,3860 3150,4882.28 3267.72,5000 4212.6,5000 4212.6,4505 3645,4505 3205,4065 3205,3860
  region: 2086.61,5000 2086.61,4608.39 2835,3860 2990,3860 2990,4890 2880,5000

## Dimensions
4921.26,4921.26 to 4921.26,1377.95 on Mechanical 1
1377.95,4921.26 to 4921.26,4921.26 on Mechanical 1
4983.69,1181.1 to 4983.69,5118.11 on Mechanical 1
1181.1,4983.69 to 5118.11,4983.69 on Mechanical 1

## Text inside footprints (layer, text, board x,y; h text height)
CR1: Top Overlay "*" at 4086.69,3154.92 h50 r180
U2: Top Overlay "*" at 3883.79,2167.07 h50 r90